# Altium PCB MDBT42Q - Copy (3) - Copy.PcbDoc
Units mil, origin at the board's own origin, x right, y up, seen from the top; angles counter-clockwise.
Board outline 996 x 1675 mil, 2 copper layers (Top Layer, Bottom Layer); 22 components, 17 nets, 121 pads, 0 vias.
Unrouted connection lines stored in the file: 1.
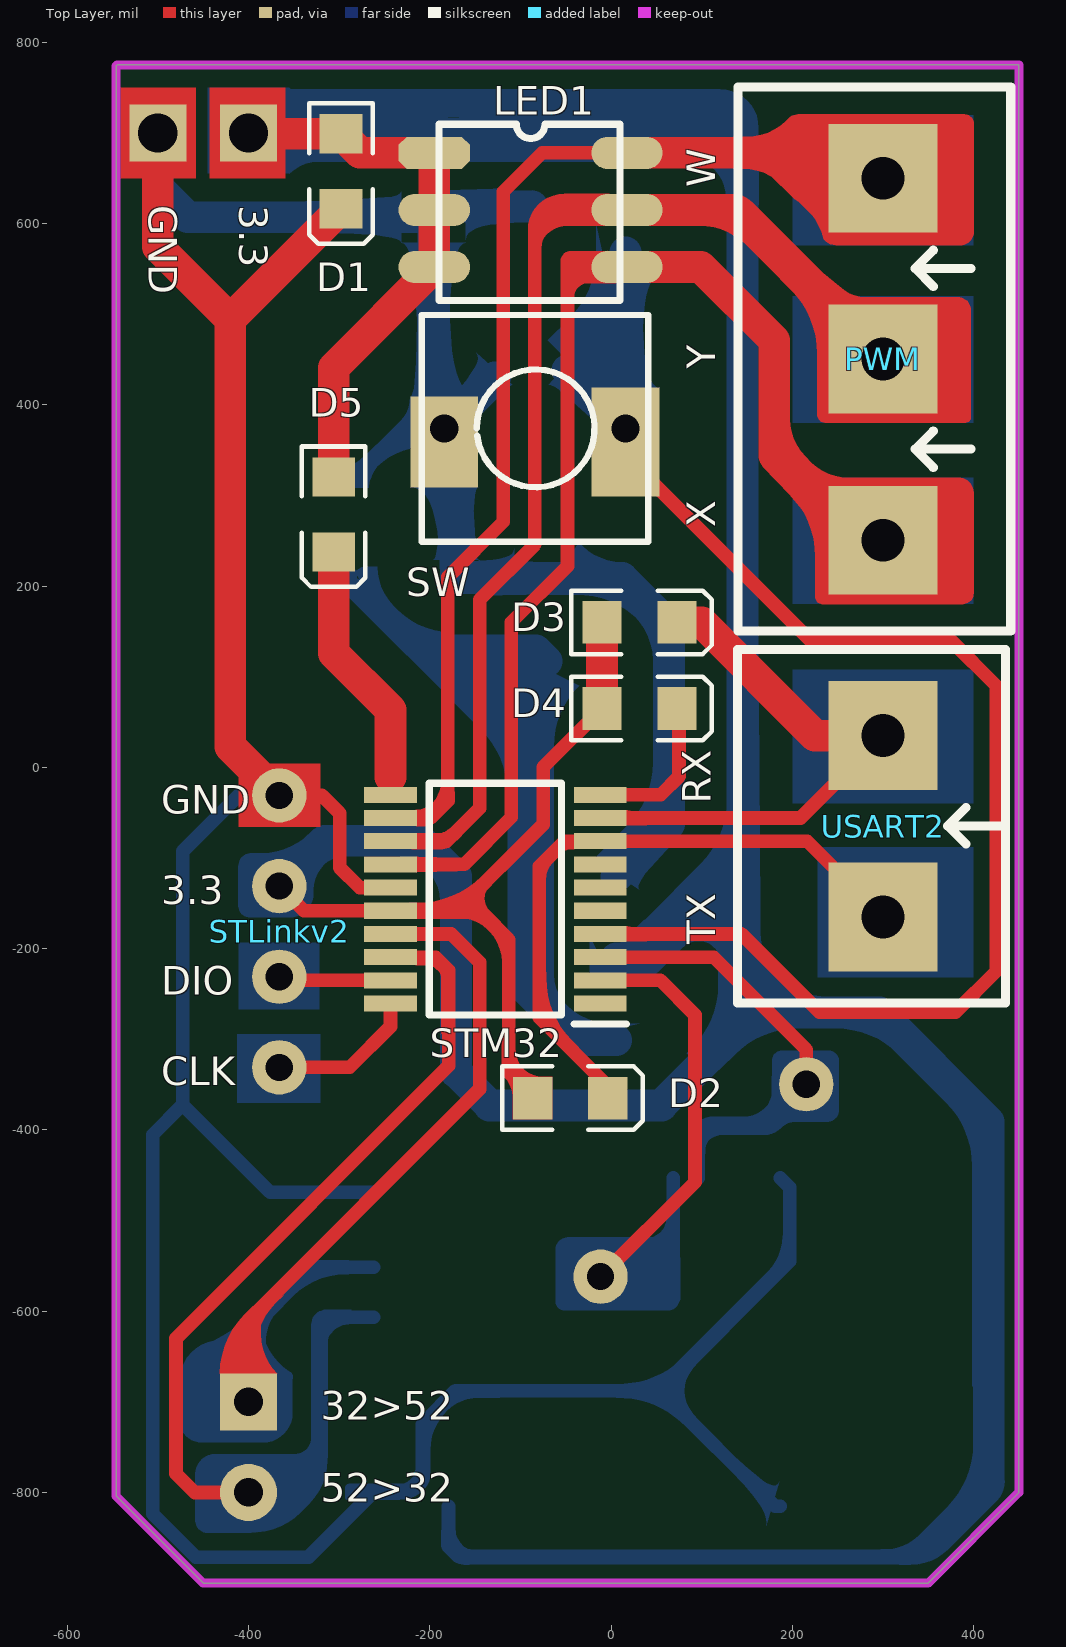
[diagram p0: Top Layer view]
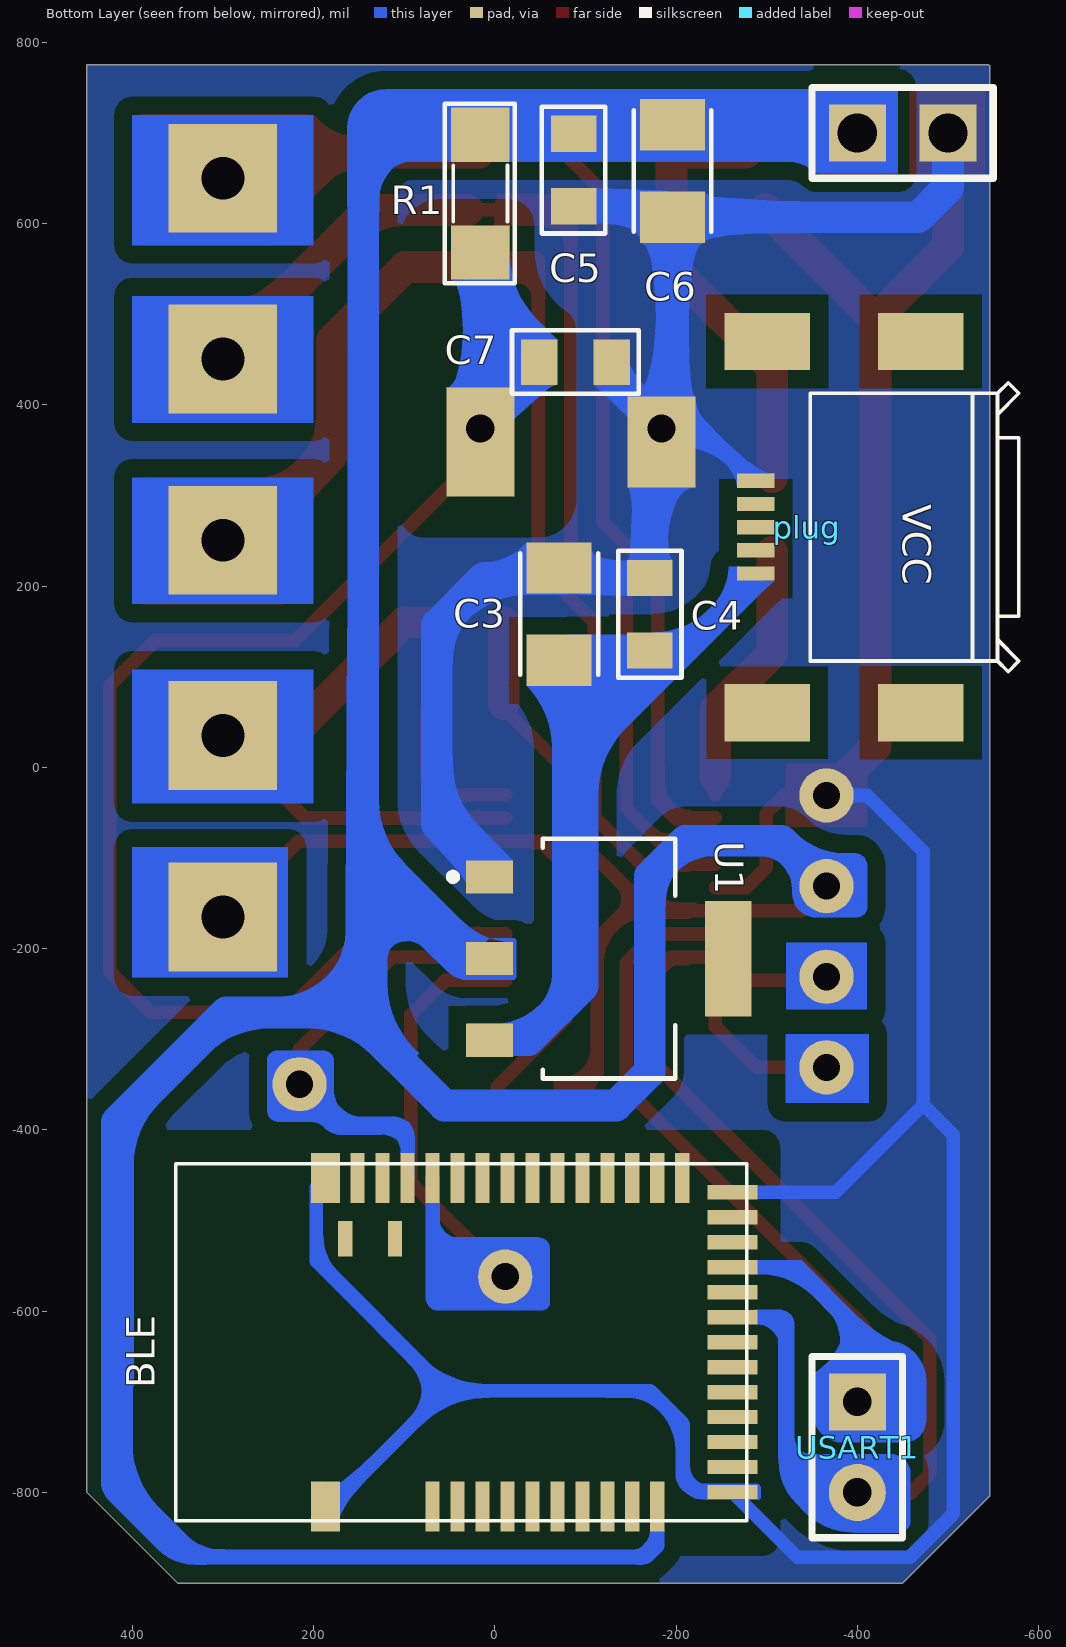
[diagram p1: Bottom Layer view, seen from below]
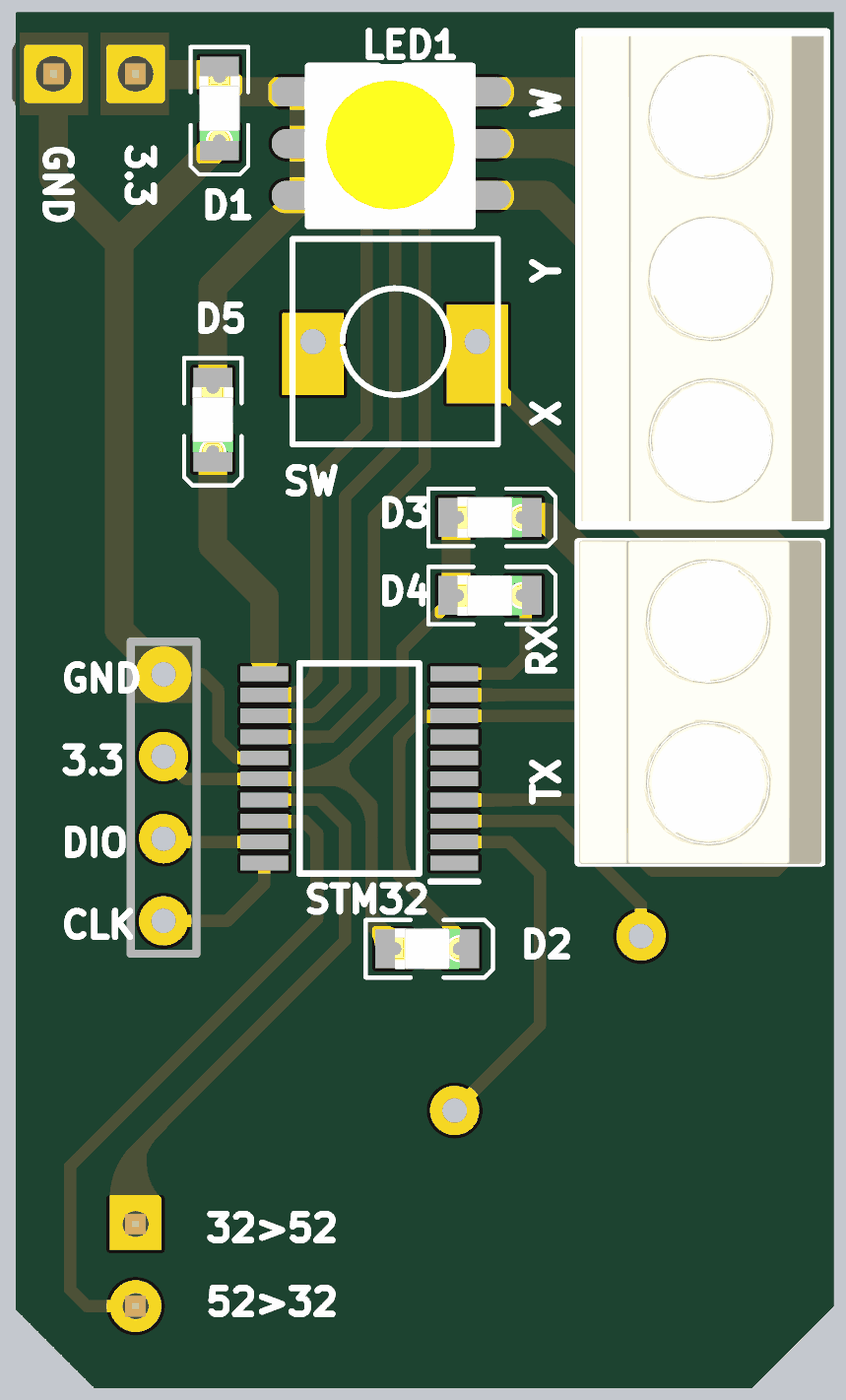
[diagram p2: 3D render of the assembled board from above, using the file's embedded part models]

## Layer stack, top to bottom
Top Solder: solder mask 0.4, Solder Resist, Dk 3.5
Top Layer: signal copper 1.4
Dielectric1: dielectric 12.6, FR-4, Dk 4.8
Bottom Layer: signal copper 1.4
Bottom Solder: solder mask 0.4, Solder Resist, Dk 3.5

## Board outline
-450,-900 -546,-804 -546,774 -545,775 450,775 450,-800 350,-900

## Design rules (kind name [scope] priority, off if disabled: settings)
Clearance [All] p1: gap=20
PlaneClearance [All] p1: clearance=39.37
PlaneConnect [All] p1: planeconnectstyle=Direct reliefexpansion=20 reliefentries=4 reliefconductorwidth=10 reliefairgap=10
PolygonConnect [All] p1: connectstyle=Direct reliefconductorwidth=10 reliefentries=4 polygonreliefangle="90 Angle" airgapwidth=10
RoutingVias [All] p1: holewidth=28 width=50 viastyle="Through Hole" minholewidth=28 minwidth=50 maxholewidth=28 maxwidth=50
SolderMaskExpansion [All] p1: expansion=4
Width [All] p1: maxlimit=35 minlimit=15 preferedwidth=20 minimp=50.000000 maximp=50.000000 favimp=50.000000
28 further rules are at their usual default settings.

## Components (designator, comment, footprint, x,y, rotation, side; value= is the part's Value field where it differs from the comment)
BLE "MODULE_MDBT42Q" PCB_MDBT42Q_10X16 352.12,-634.17 r90 bottom
C3 "C3216X5R1A106K160AB" CAPC3216X180 -71,169 r90 bottom
C4 "2u2" 0805C-GENERIC -171,139 r90 bottom
C5 "2u2" 0805C-GENERIC -87,689 r270 bottom
C6 "C3216X5R1A106K160AB" CAPC3216X180 -196,658.02 r270 bottom
C7 "10u" 0805C-GENERIC -59,447 r180 bottom
D1 "LED SMD" LED_0805_Blue -298,657.66 r270 top
D2 "LED SMD" LED_0805_Blue -45,-365 r0 top
D3 "LED SMD" LED_0805_Blue 31.34,160 r0 top
D4 "LED SMD" LED_0805_Blue 31.34,65 r0 top
D5 "LED SMD" LED_0805_Blue -306,279 r270 top
LED1 "150141M173100" "LED RGB 5050" -85,615 r0 top
plug "ZX62M-B-5P(01)" HRS_ZX62M-B-5P(01) -420,265 r90 bottom
PWM "Header 3 - M" "Medium - Header 3" 300,250.5 r90 top
R1 "RESISTOR SMD" RES-SM-1206 16,568 r90 bottom
STLinkv2 "JP" "Jumper 4x1" -306,-291 r0 top
STM32 "STM32F070F6P6" SOP65P640X120-20N -127.67,-145.43 r180 top
SW "SW" SW2 16,374 r180 top
U1 "AMS1117-3.3" SOT229P700X180-4N -126,-211 r270 bottom
USART1 "" JP2-D1T#1 -400,-700 r270 bottom
USART2 "Header 2 - M" "Medium - Header 2" 300,-65 r270 top
VCC "JP2" JP2-D1T#2 -400,700 r180 bottom

## Footprints (in the part's own frame and the unit in brackets; to place one, negate y for a bottom-side part, rotate by r counter-clockwise, add the part's x,y. Pads: shape width x height; smd on the part's side, far side on the other; paste and mask are expansions set on the pad)
0805C-GENERIC [mil] "CAPACITOR 0805"
  rect 40x50 smd: 1(-10,0) 2(70,0)
  silkscreen extent -40,-35 100,35, body extent -11,-25 70,25, height 26
CAPC3216X180 [mm]
  rect 1.44x1.82 smd: 1(-1.295,0) 2(1.295,0)
  silkscreen extent -1.7,-1.09 1.7,1.09
HRS_ZX62M-B-5P(01) [mm]
  rect 0.4x1.05 smd: 1(-1.3,3.355) 2(-0.65,3.355) 3(0,3.355) 4(0.65,3.355) 5(1.3,3.355)
  rect 1.6x2.4 smd: S1(5.2,-1.27) S2(-5.2,-1.27) S3(-5.2,3.03) S6(5.2,3.03)
  rect 0x0 smd: S4(-2.35,5.13) S5(2.35,5.13)
  silkscreen extent -4.05,-4.02 4.05,1.83
JP2-D1T#1 [mm] "2 pins, 1 row, straight, gold plating"
  rect 1.6x1.6 hole 0.8: 1(0,0)
  round 1.6 hole 0.8: 2(2.54,0)
  silkscreen extent -1.27,-1.27 3.81,1.27, body extent -1.27,-1.27 3.81,1.27, height 8.54
JP2-D1T#2 [mm] "2 pins, 1 row, straight, gold plating"
  rect 1.6x1.6 hole 1.1: 1(0,0) 2(2.54,0)
  silkscreen extent -1.27,-1.27 3.81,1.27, body extent -1.27,-1.27 3.81,1.27, height 8.54
"Jumper 4x1" [mil]
  round 60 hole 30: 1(-60,260) 2(-60,160) 3(-60,60) 4(-60,-40)
"LED RGB 5050" [mm]
  oct 2x0.9 smd: 1(-2.794,1.6)
  oval 2x0.9 smd: 2(-2.794,0) 3(-2.794,-1.6) 4(2.606,-1.6) 5(2.606,0) 6(2.606,1.6)
  silkscreen extent -2.67,-2.54 2.41,2.4, body extent -2.78,-2.54 2.52,2.46, height 1.6
LED_0805_Blue [mm] "Chip LED, 2-Leads, Body 2.0x1.3mm, IPC Medium Density"
  rect 1.1x1.2 smd: 1(-1.05,0) 2(1.05,0)
  silkscreen extent -1.91,-0.89 2.03,0.89, body extent -1,-0.63 1,0.62, height 0.68
"Medium - Header 2" [mil]
  rect 120x120 hole 47.24: 1(-100,0) 2(100,0)
  silkscreen extent -195,-161 195,135, body extent -197,-160 197,135, height 394
"Medium - Header 3" [mil]
  rect 120x120 hole 47.24: 1(0,0) 2(200,0) 3(399.5,0)
  silkscreen extent -100,-141 500,160, body extent -95,-138 495,157, height 394
PCB_MDBT42Q_10X16 [mm]
  rect 1.4x0.8 smd: 1(-4.6,-4.2) 39(4.6,-4.2)
  rect 1.4x0.4 smd: 2(-4.6,-7.2) 3(-4.6,-7.9) 4(-4.6,-8.6) 5(-4.6,-9.3) 6(-4.6,-10) 7(-4.6,-10.7) 8(-4.6,-11.4) 9(-4.6,-12.1) 10(-4.6,-12.8) 11(-4.6,-13.5) 25(4.6,-14.2) 26(4.6,-13.5) 27(4.6,-12.8) 28(4.6,-12.1) 29(4.6,-11.4) 30(4.6,-10.7) 31(4.6,-10) 32(4.6,-9.3) 33(4.6,-8.6) 34(4.6,-7.9) 35(4.6,-7.2) 36(4.6,-6.5) 37(4.6,-5.8) 38(4.6,-5.1)
  rect 0.4x1.4 smd: 12(-4.2,-15.6) 13(-3.5,-15.6) 14(-2.8,-15.6) 15(-2.1,-15.6) 16(-1.4,-15.6) 17(-0.7,-15.6) 18(0,-15.6) 19(0.7,-15.6) 20(1.4,-15.6) 21(2.1,-15.6) 22(2.8,-15.6) 23(3.5,-15.6) 24(4.2,-15.6)
  rect 1x0.4 smd: 40(2.9,-4.75) 41(2.9,-6.15)
  silkscreen extent -5,-16 5,0
RES-SM-1206 [mil]
  rect 60x65 smd: 1(0,0) 2(130,0)
  silkscreen extent -34,-38 164,39, body extent 2,-31 128,31, height 40
SOP65P640X120-20N [mm]
  rect 1.475x0.45 smd: 1(-2.938,2.925) 2(-2.938,2.275) 3(-2.938,1.625) 4(-2.938,0.975) 5(-2.938,0.325) 6(-2.938,-0.325) 7(-2.938,-0.975) 8(-2.938,-1.625) 9(-2.938,-2.275) 10(-2.938,-2.925) 11(2.938,-2.925) 12(2.938,-2.275) 13(2.938,-1.625) 14(2.938,-0.975) 15(2.938,-0.325) 16(2.938,0.325) 17(2.938,0.975) 18(2.938,1.625) 19(2.938,2.275) 20(2.938,2.925)
  silkscreen extent -3.68,-3.25 1.85,3.5, body extent -2.25,-3.3 2.25,3.3
SOT229P700X180-4N [mm]
  rect 0.93x1.31 smd: 1(-2.29,-3.345) 2(0,-3.345) 3(2.29,-3.345)
  rect 3.24x1.31 smd: 4(0,3.345)
  silkscreen extent -3.36,-4.47 3.36,1.86
SW2 [mil] "SW button 2pin, 250x 250 mil"
  rect 75x120 hole 31 copper offset 0,15: 1(0,0)
  rect 75x100 hole 31 copper offset 0,15: 2(200,0)
  silkscreen extent -25,-125 225,125

## Part data
BLE: "MDBT42Q"
C3 C6: "C Series 1206 10 uF 10 V ±10 % Tolerance X5R SMT Multilayer Ceramic Capacitor"
C4 C5 C7: library part 0805C-2U2-6V3-X5R-PAN, "CAPACITOR 0805 CERAMIC"
D1 D2 D3 D4 D5: "LED"
LED1: library part "LED RGB 5050"
plug: "Conn Rcpt Micro Usb b Mid Mnt"
PWM: "Header, 3-Pin, Medium"
R1: "Resistor"
STLinkv2: library part "Jumper 4x1"
STM32: "STMICROELECTRONICS - STM32F070F6P6 - MCU, 32BIT, CORTEX-M0, 48MHZ, TSSOP-20"
SW: library part "Tact SW - 2Pin", "Switch button 2 pin"
U1: "Sot223/Pkg 1-Amp 3.3-Volt Low Drop Out Voltage Regulatator"
USART1: library part JP2, "WR-PHD 2.54 mm Angled Socket Header"
USART2: "Header, 2-Pin, Medium"
VCC: "WR-PHD 2.54 mm Angled Socket Header"

## Free pads (board coordinates)
  round 60 hole 30: 3(215.41,-349.6) MD(-11.56,-561.87)

## Nets (pads, with @x,y where several pads share a name; then routed paths per layer and width w, separated by ;. In a path a pad name is that pad's centre, name@x,y a point inside that pad or via, vN(x,y) a via of type N, cw(c..) or ccw(c..) an arc to the next point about the centre after c; other vN are vias at no path point)
5.0V: C3.1 C4.1 plug.1 U1.3 | length 795.3
  Bottom Layer w15: plug.1 -287.91,196.91 -220,129 C4.1
  Bottom Layer w35: C3.1@-71,117.03 -82.97,129 C4.1 -97,55 -97,-241.19 -37.03,-301.16 U1.3
32>52: BLE.21 STM32.17 USART1.1 | length 948.2
  Top Layer w15: USART1.1 -400,-610 -145,-355 -145,-215 -176.18,-183.82 STM32.17
  Bottom Layer w15: USART1.1 -400,-620 -331.5,-551.5 BLE.21
52>32: BLE.19 STM32.18 USART1.2 | length 1137.3
  Top Layer w15: USART1.2 -459.38,-800 -480,-779.38 -480,-630 -179,-329 -179,-224 -193.59,-209.41 STM32.18
  Bottom Layer w15: USART1.2 -391,-791 -351,-791 -322,-762 -322,-625 -303.61,-606.61 BLE.19
+3.3V: BLE.11 C5.1 C6.1 D1.1 D2.1 D3.1 D4.1 D5.1 LED1.1 LED1.2 LED1.3 R1.2 STLinkv2.2 STM32.16 U1.2 VCC.1 | length 5370.3
  Top Layer w15: STLinkv2.2 -338.77,-158.23 STM32.16 -144.77,-158.23 -113,-190 -113,-336.34 -85.34,-364 D2.1 ; -170.12,-158.11 -75,-63 -75,0 D4.1
  Top Layer w35: VCC.1 -399,699 D1.1 -276.99,677.99 LED1.1 LED1.2 LED1.3 -306,441.01 D5.1 ; D4.1@-10,70 D3.1
  Bottom Layer w15: BLE.11 -179.37,-853.28 -160.46,-872.19 331.81,-872.19 416.87,-787.13
  Bottom Layer w35: VCC.1@-396,709 C6.1 -186,699 C5.1 -86,698 R1.2 107.12,698.02 145,660.14 145,-85 ; STLinkv2.2 -315.86,-80.86 -210.14,-80.86 -171,-120 -171,-336 -134,-373 55.61,-373 158.18,-270.43 ; U1.2 19,-211 145,-85 ; 145,-279.85 145,-85 ; 159.1,-270.43 296.17,-270.43 416.87,-391.13 416.87,-787.13
CLK: STLinkv2.4 STM32.20 | length 156
  Top Layer w15: STLinkv2.4 -288.3,-331 -243.34,-286.04 -243.34,-271.36
DIO: STLinkv2.3 STM32.19 | length 124.3
  Top Layer w15: STLinkv2.3 -362,-235 STM32.19
GND: BLE.1 BLE.12 BLE.24 BLE.39 C3.2 C4.2 C5.2 C6.2 C7.2 D1.2 plug.5 STLinkv2.1 STM32.15 SW.2 U1.1 VCC.2 | length 5124.7
  Top Layer w15: STLinkv2.1 -319,-31 -299.52,-50.48 -299.52,-110.48 -277.36,-132.64 STM32.15
  Top Layer w35: VCC.2 -500,574.32 -420,494.32 ; STLinkv2.1 -420,23 -420,494.32 ; D1.2 -420,494.32
  Bottom Layer w15: STLinkv2.1 -411,-31 -472.7,-92.7 -472.7,-372.3 ; plug.5 -230.09,374 -194,374 SW.2 ; BLE.24 -376.18,-468.82 -472.7,-372.3 ; BLE.1 181.27,-815.27 54,-688 ; BLE.39 197,-463.3 197,-545 54,-688 ; -472.7,-372.3 -505.69,-405.29 -505.69,-823.65 -458.08,-871.26 -333.78,-871.26 BLE.12 -223.53,-799.53 -208,-784 -208,-725 -171,-688 54,-688
  Bottom Layer w35: VCC.2 -500,640 -467.03,607.03 C6.2 ; SW.2@-194,371 -194,374 -196,376 C6.2 ; C7.2@-128,430 SW.2 -171,361 C4.2 12,209 64,157 64,-62.54 U1.1 ; C5.2 -184.03,619 C6.2
MD_RESET: BLE.35 pad.MD STM32.2 | length 635.5
  Top Layer w15: STM32.2 54.5,-235 92.59,-273.09 92.59,-457.72 pad.MD
  Bottom Layer w15: pad.MD -7.13,-566.3 48.13,-566.3 68.66,-545.78 BLE.35
NetC7_1: C7.1 R1.1 STM32.4 SW.1 | length 1635.1
  Top Layer w15: STM32.4 143.82,-183.82 230,-270 380,-270 425,-225 425,90 375,140 220,140 16,344 SW.1
  Bottom Layer w35: C7.1@-48,438 SW.1 R1.1
PA2: D2.2 STM32.8 USART2.2 | length 713
  Top Layer w15: D2.2 -2.66,-364 -2.66,-352.34 -79,-276 -79,-109 -51.46,-81.46 STM32.8 216.46,-81.46 USART2.2
PA3: D3.2 STM32.9 USART2.1 | length 628.7
  Top Layer w15: STM32.9 209.13,-55.87 USART2.1
  Top Layer w35: D3.2 100,160 225,35 USART2.1
PA4: D4.2 STM32.10 | length 170.4
  Top Layer w15: STM32.10 54.72,-30.28 75,-10 D4.2@75,65
PA5: D5.2 STM32.11 | length 293.9
  Top Layer w15: STM32.11 -243.34,-10.66
  Top Layer w35: D5.2 -306,126 -243.34,63.34 -243.34,-10.66
PWM_WHITE: LED1.6 PWM.3 STM32.12 | length 1215.7
  Top Layer w15: STM32.12 -200.87,-55.87 -180,-35 -180,210 -119,271 -119,635 -76.01,677.99 LED1.6
  Top Layer w35: LED1.6 272.01,677.99 PWM.3
PWM_X: LED1.4 PWM.1 STM32.14 | length 1326.1
  Top Layer w15: STM32.14 -162.05,-107.05 -110,-55 -110,160 -48,222 -48,537 -32.99,552.01 LED1.4
  Top Layer w35: LED1.4 98.99,552.01 180,471 180,344 273.5,250.5 PWM.1
PWM_YELLOW: LED1.5 PWM.2 STM32.13 | length 1237.4
  Top Layer w15: STM32.13 -181.46,-81.46 -145,-45 -145,185 -84,246 -84,592 -61,615 LED1.5 LED1.5@30,615
  Top Layer w35: LED1.5@30,615 135.5,615 PWM.2
SWDCLK: BLE.36 pad.3 STM32.3 | length 497.9
  Top Layer w15: STM32.3 113.41,-209.41 215.41,-311.41 pad.3
  Bottom Layer w15: BLE.36 96.22,-405.31 104.69,-396.84 168.17,-396.84 pad.3
pads on no net: BLE.2 BLE.3 BLE.4 BLE.5 BLE.6 BLE.7 BLE.8 BLE.9 BLE.10 BLE.13 BLE.14 BLE.15 BLE.16 BLE.17 BLE.18 BLE.20 BLE.22 BLE.23 BLE.25 BLE.26 BLE.27 BLE.28 BLE.29 BLE.30 BLE.31 BLE.32 BLE.33 BLE.34 BLE.37 BLE.38 BLE.40 BLE.41 plug.2 plug.3 plug.4 plug.S1 plug.S2 plug.S3 plug.S4 plug.S5 plug.S6 STM32.1 STM32.5 STM32.6 STM32.7 U1.4

## Polygon pours and split planes (outlines as drawn)
no net on Top Layer "NONET_L01_P011" (solid, pour order 11): 240.32,727.54
GND on Top Layer "GND_L01_P001" (solid, pour order 1): -276.99,660.49
GND on Bottom Layer "GND_L02_P015" (solid, pour order 15): -545,775 450,775 450,-800 360,-890 350,-900 -435,-900 -450,-900 -530,-820 -546,-804 -546,774

## Keep-outs
Top Layer:
  the board outline again, w10

## Other copper
Top Layer:
  rectangle net GND: -411.01,-66.03 -320.75,4.05
  rectangle net GND: -541.34,649.61 -457.68,750
  rectangle net +3.3V: -442.91,649.61 -359.25,750
  region: -21.38,418.88
  region net PWM_WHITE: 17.85,673.94
  region net PWM_X: -3.4,569.73 -45.08,569.5 -42.34,567.46 -4.09,568.41
  region: -44.5,-8.5
  region: 11.3,41.4
  region: -272.28,-149.53
  region net PWM_YELLOW: -215.38,-72.64 -190.04,-72.64 ccw(c-190.04,-56.37) -178.54,-67.88 -175.75,-70.67 ccw(c-164.71,-59.63) -164.71,-75.24 -175.56,-86.09 cw(c-185.44,-76.2) -185.44,-90.19 -218.43,-90.19 cw(c-218.43,-82.62) -223.78,-87.97
  region net PWM_WHITE: -214.69,-64.73 -202.43,-64.73 ccw(c-202.43,-53.01) -194.14,-61.3 -174.06,-41.22 ccw(c-177.7,-37.57) -172.55,-37.57 -172.55,-27.85 ccw(c-175.42,-27.85) -173.39,-25.82 -198.73,-51.16 cw(c-218.2,-31.7) -218.2,-59.23
  region net PWM_WHITE: -215.38,-46.92 ccw(c-215.38,-21.8) -197.61,-39.56 -196.87,-38.83 ccw(c-219.5,-16.2) -187.5,-16.2 -187.5,5.26 -187.1,5.26 cw(c-185.32,0.55) -183.25,0.55 -183.25,-39.14 -188.1,-43.99 cw(c-214.83,-17.27) -214.83,-55.06
  region net +3.3V: -215.42,-166.95 -153.64,-166.95 ccw(c-153.64,-164.4) -151.83,-166.2 cw(c-149.58,-163.94) -152.77,-163.94 -152.77,-161.71 -217.76,-161.71
  region net 52>32: -215.55,-218.37 -202.66,-218.37 cw(c-202.66,-232.63) -192.57,-222.55 -190.27,-224.85 cw(c-197.55,-232.14) -187.25,-232.14 -187.25,-293.05 cw(c-188.87,-293.05) -187.73,-294.2 cw(c-182.58,-299.34) -182.59,-292.07 -182.59,-229.41 ccw(c-200.8,-229.41) -187.92,-216.53 ccw(c-193.3,-221.92) -193.3,-214.3 -215.55,-214.3
  region net PWM_YELLOW: -35.9,632.73 -51.6,632.73 ccw(c-51.6,592.78) -91.56,592.78 ccw(c-90.78,592.78) -90.78,592 -84,592 -37.01,612.89 -10.75,622.27
  region net PA2: -40.68,-90.36 -45.6,-90.36 ccw(c-45.6,-99.29) -51.91,-92.97 -65.29,-106.35 ccw(c-50.27,-121.38) -71.52,-121.38 -81.42,-121.38 cw(c-81.42,-114.3) -86.42,-119.3 -58.43,-91.32 cw(c-39.36,-110.39) -39.36,-83.42
  region net PWM_WHITE: 149.54,695.63 ccw(c149.54,758.05) 193.67,713.91 196.03,716.28 cw(c205.93,706.38) 205.93,720.38 389.99,720.38 cw(c390,710.13) 400.24,710.13 400.24,591.28 cw(c385,591.28) 385,576.04 251.04,576.04 cw(c248.81,593.59) 234.77,582.83 ccw(c165.75,565.82) 202.51,626.66 172.89,656.28 ccw(c160.51,643.91) 160.51,661.41
  region net PWM_X: 167.63,331.63 196.01,303.24 cw(c125.3,232.53) 225.3,232.53 225.3,188.36 ccw(c233.79,188.36) 233.79,179.86 388.37,179.86 ccw(c388.37,192) 400.01,192 400.01,303.15 ccw(c383.52,303.15) 383.52,319.64 261.32,319.64 cw(c261.32,376.61) 221.03,336.33 214.62,342.73 cw(c256.42,384.53) 197.31,384.53 189.73,384.53 cw(c189.73,393.32) 183.51,387.11 179.32,382.91 ccw(c209.15,353.08) 166.96,353.08
  region net PWM_YELLOW: 233.83,545.62 156.26,623.19 ccw(c133.77,600.7) 133.77,632.5 128.54,632.5 ccw(c128.54,607.1) 110.58,625.06 107.21,621.69 ccw(c131.3,597.6) 97.23,597.6 cw(c97.23,523.32) 149.75,575.84 198.35,527.24 cw(c127.64,456.52) 227.64,456.52 227.64,388.69 ccw(c235.9,388.69) 235.9,380.43 391.47,380.43 ccw(c391.47,385.85) 396.89,385.85 396.89,504.55 ccw(c382.71,504.55) 382.71,518.73 281.15,518.73 cw(c281.15,560.49) 251.62,530.96
  region net PWM_YELLOW: -1.94,632.73 -35.9,632.73 ccw(c-35.9,589.32) -66.6,620.02 ccw(c-42.51,595.93) -76.57,595.93 -76.57,575.22 cw(c-59.26,575.22) -71.5,587.46 cw(c-47.76,563.72) -47.76,597.29 0.32,597.29 0.32,620.54 ccw(c-8.52,620.54) -2.27,626.8
  region net PWM_X: 4.97,534.28 -25.22,534.28 ccw(c-25.22,518.98) -40.52,518.98 cw(c-44.13,518.98) -44.13,515.36 -52.6,515.36 cw(c-52.6,518.23) -55.47,518.23 -55.47,558.8 cw(c-44.77,558.8) -44.77,569.5 -5,569.5
  region net PA2: -43.11,-301.33 cw(c25.79,-232.44) -71.64,-232.44 -71.64,-225.93 ccw(c-65.47,-232.11) -74.2,-232.11 -74.2,-272.35 ccw(c-66.81,-272.35) -72.04,-277.57 -46.93,-302.68
  region net +3.3V: -64.88,-341.32 -76.19,-341.32 cw(c-76.19,-313.15) -96.11,-333.07 cw(c-72.94,-309.9) -105.71,-309.9 -105.71,-282.66 -108.27,-282.66 ccw(c-108.27,-292.1) -114.94,-285.43 ccw(c-101.64,-298.73) -120.45,-298.73 -120.45,-337.27 -120.31,-337.4 cw(c-150.56,-367.13) -108.22,-369.5 -108.22,-388.33 -66.01,-388.33 ccw(c-66.01,-386.99) -65.06,-387.94
  region net +3.3V: -168.54,-165.69 cw(c-168.54,-211.63) -136.06,-179.15 -134.35,-180.86 cw(c-168.46,-214.97) -120.22,-214.97 -120.22,-249.7 ccw(c-122.75,-247.17) -119.18,-247.17 -119.18,-192.49 -146.74,-164.93 ccw(c-151.06,-169.26) -151.06,-163.14 -165.7,-163.14 ccw(c-165.7,-165.89) -167.64,-163.95
  region net +3.3V: -222.25,-149.41 -213.5,-149.41 ccw(c-213.5,-49.41) -142.79,-120.12 -125.21,-102.54 -124.9,-102.86 ccw(c-124.9,-112.56) -126.46,-111 -167.96,-152.49 cw(c-170.92,-149.53) -170.92,-153.72 -221.58,-153.72
  region net +3.3V: -131.42,-130 -135.45,-134.03 ccw(c-124.98,-144.49) -139.78,-144.49 ccw(c-120.09,-144.49) -134.02,-158.42 -109.27,-183.16 cw(c-114.83,-177.6) -114.83,-185.46 -120.44,-185.46 ccw(c-127.44,-185.46) -122.49,-180.51 -144.77,-158.23 ccw(c-153.5,-166.96) -153.5,-154.61 -157.73,-154.61
  region net 32>52: -395.03,-594.37 -404.66,-604.01 ccw(c-339.89,-668.78) -431.5,-668.78 ccw(c-418.96,-656.24) -418.96,-673.97 -376.8,-673.97 ccw(c-376.8,-665.9) -371.09,-671.61 -368.44,-668.96 cw(c-325.05,-625.57) -386.41,-625.57 -386.41,-615.78 cw(c-365.59,-615.78) -380.31,-601.06 -364.09,-584.84
  region net PWM_X: 359.9,310.8 284.12,310.8 cw(c284.12,410.8) 213.41,340.09 212.1,341.4 cw(c249.76,379.06) 196.5,379.06 196.5,399.4 165.9,368.8 cw(c161.73,364.63) 167.63,364.63 167.63,331.63 210.81,288.44 cw(c140.1,217.73) 240.1,217.73 240.1,192.1 ccw(c240.1,272.01) 296.61,215.51 311.2,230.1
  region net PWM_YELLOW: 359.5,510.4 310.47,510.4 cw(c310.47,610.4) 239.76,539.69 233.83,545.62 cw(c216.41,563.04) 216.41,538.4 186.8,538.4 210.81,514.39 cw(c140.1,443.68) 240.1,443.68 240.1,391
  region net PWM_WHITE: 240.4,590.8 188.34,642.86 ccw(c146,600.53) 146,660.4 ccw(c146,665.47) 149.58,661.88 182.4,694.7 ccw(c222.74,735.04) 222.74,677.99 272.01,677.99
  region net 32>52: -361.3,-582.2 -370.62,-591.52 ccw(c-318.04,-644.1) -392.4,-644.1 ccw(c-407.37,-644.1) -396.78,-633.52 -398.4,-631.9 cw(c-394.54,-628.04) -400,-628.04 -400,-610
Bottom Layer:
  rectangle net PA2: 228,-232 400,-88
  rectangle net PA3: 200,-40 400,108
  rectangle net PWM_X: 200,180 400,320
  rectangle net PWM_YELLOW: 200,380 400,520
  rectangle net PWM_WHITE: 200,576 400,720
  rectangle net +3.3V: -445,655 -355,750
  rectangle net DIO: -410.86,-267.39 -321.42,-193.2
  rectangle net CLK: -412.68,-370.47 -320.74,-294.01
  region net 5.0V: -308.53,206.05 -291.19,206.05 -291.19,189.62
  region net +3.3V: 196.57,-279
  region: -115.67,-861.66
  region net MD_RESET: 76.15,-541.05 76.15,-587.56 cw(c61.47,-583.7) 57.61,-598.38
  region net MD_RESET: 60.94,-479.48 60.94,-498.56 cw(c40.82,-498.56) 40.82,-518.68 -48.41,-518.68 ccw(c-48.41,-531.16) -60.89,-531.16 -60.89,-590.13 ccw(c-52.14,-590.13) -52.14,-598.88 63.54,-598.88 ccw(c63.54,-587.38) 75.04,-587.38 75.04,-537.82 ccw(c70.33,-537.82) 70.33,-533.11
  region net +3.3V: 20.83,-234.49 29.65,-234.49 ccw(c29.65,-202) 52.62,-224.97 78.11,-199.49 cw(c96.87,-218.25) 96.87,-191.72 97.74,-191.72 cw(c97.74,-214) 113.5,-198.24 cw(c101.28,-210.46) 118.56,-210.46 118.56,-239.11 cw(c18.56,-239.11) 89.27,-309.82 83.51,-315.58 86.98,-319.05 ccw(c90.05,-315.98) 90.05,-320.32 ccw(c90.05,-300.25) 104.25,-314.44 154.2,-264.49 154.2,-188.99 ccw(c81.18,-188.99) 132.82,-137.36 ccw(c132.82,-232.02) 65.88,-165.08 16.83,-214.13 ccw(c19.37,-216.67) 15.78,-216.67
  region net +3.3V: -357.31,748.06 120.29,748.06 cw(c120.29,705.78) 162.57,705.78 162.57,621.43 cw(c149.6,621.43) 149.6,608.46 cw(c149.6,620.62) 137.43,620.62 137.43,677.39 ccw(c96.88,677.39) 96.88,717.94 -363.78,717.94
  region net +3.3V: 241.69,-253.15 240.4,-253.15 cw(c240.4,-174.52) 184.8,-230.12 cw(c233.58,-181.34) 164.6,-181.34 164.6,-154.24 cw(c155.52,-154.24) 161.94,-160.65 151.21,-171.39 cw(c147.83,-174.77) 152.61,-174.77 152.61,-226.6 cw(c152.61,-240.83) 162.66,-230.77 192.32,-260.42 ccw(c216.12,-236.62) 216.12,-270.28 250.57,-270.28
  region net +3.3V: -16.38,668.12 -323.33,668.12 ccw(c-323.33,623.33) -355,655 -371.06,671.06 cw(c-367.62,674.51) -372.49,674.51 ccw(c-372.49,715.29) -343.65,686.45 -326.21,703.89 ccw(c-308.36,721.75) -308.36,696.49 -6.83,696.49
  region net +3.3V: 48.29,668 93.44,668 cw(c93.44,638.71) 114.15,659.42 cw(c82.25,627.52) 127.37,627.52 127.37,613.81 127.77,613.81 ccw(c127.77,620.24) 132.32,615.69 ccw(c120.34,627.67) 137.28,627.67 137.28,655.48 ccw(c125.19,655.48) 133.74,664.03 113.61,684.15 ccw(c106.71,677.25) 106.71,687.01 42.74,687.01
  region net +3.3V: -162.62,737.29 102.27,737.29 cw(c102.27,676.72) 162.84,676.72 162.84,621.26 cw(c149.38,621.26) 149.38,607.81 142.16,607.81 cw(c142.16,617.65) 132.32,617.65 132.32,672.82 ccw(c107.12,672.82) 107.12,698.02 -160.38,698.02 cw(c-160.38,705.93) -168.29,705.93
  region net +3.3V: -231.71,737.23 -327.23,737.23 cw(c-327.23,772.84) -352.42,747.66 -360.49,739.59 cw(c-365.91,745.01) -365.91,737.34 cw(c-365.91,699.23) -338.97,726.18 -338.48,725.69 ccw(c-316,748.18) -316,716.38 -221.78,716.38
  region net +3.3V: -231.71,680.77 -292.78,680.77 ccw(c-292.78,592.78) -355,655 -356.92,656.92 ccw(c-373.67,640.17) -373.67,663.86 -373.67,701.96 cw(c-311.21,701.96) -355.38,746.12 -355.38,703.73 ccw(c-345.44,703.73) -352.47,696.7 ccw(c-345.62,703.55) -345.62,693.87 -226.44,693.87
  region net +3.3V: -20,-192.76 ccw(c-20,-114.72) 35.18,-169.9 36.78,-168.3 49.99,-181.51 cw(c33.3,-198.2) 56.9,-198.2 39.09,-216.01 ccw(c51.77,-228.69) 33.84,-228.69 33.84,-229.51 cw(c28.78,-229.51) 28.78,-234.57 -19.35,-234.57 cw(c-19.35,-230.3) -23.61,-230.3 -23.61,-191 cw(c-21.34,-191) -21.34,-188.73 5.95,-188.73 6.16,-188.52 12.74,-195.1 ccw(c12.9,-220.66) -5.18,-202.59 -12,-209.41
  region net GND: -20.1,-102.54 17.26,-65.17 ccw(c-53.45,5.54) 46.55,5.54 46.55,12.03 ccw(c66.89,-8.31) 55.08,-8.31 55.08,-88.99 cw(c-1.76,-32.16) -1.76,-112.53 -12.12,-112.53
  region net +3.3V: 339.38,-847.65 cw(c302.5,-810.76) 302.5,-862.93 297.72,-862.93 297.72,-873 ccw(c299.17,-873) 298.14,-874.03 cw(c315.94,-891.83) 315.94,-866.66 331.44,-866.66
  region net +3.3V: 318.2,-879.57 330.92,-879.57 ccw(c330.92,-821.79) 371.78,-862.65 425.48,-808.94 ccw(c403.86,-787.32) 434.44,-787.32 ccw(c434.44,-852.01) 388.69,-806.27 352.13,-842.83
  region net +3.3V: -187.21,-841.87 -187.21,-857.59 ccw(c-175.94,-857.59) -183.91,-865.56 -174.95,-874.51 ccw(c-162.52,-862.08) -162.52,-879.66 -157.45,-879.66 ccw(c-157.45,-873.67) -153.21,-877.91 -175.91,-855.2 cw(c-162.26,-841.55) -181.57,-841.55
  region net MD_RESET: 44.3,-559 cw(c44.3,-516.75) 14.43,-546.63 4.4,-536.6 4.4,-587.2 cw(c37.27,-620.07) 37.27,-573.58 48.28,-573.58 cw(c48.28,-568.81) 44.9,-572.18 41.1,-568.39
  region net GND: 46.38,-2.57 46.38,-13.69 cw(c-50.52,-13.69) 18,-82.2 ccw(c26.06,-74.14) 26.06,-85.54 40.37,-85.54 cw(c78.65,-85.54) 51.58,-58.47 58.23,-51.82 cw(c73.54,-36.51) 51.88,-36.51 51.88,-6.41
  region net GND: 26.5,166.36 cw(c-21.48,118.38) 46.38,118.38 46.38,113.62 ccw(c46.38,123.69) 53.5,116.57 56.22,119.3 ccw(c54.23,121.29) 57.05,121.29 57.05,152.69 cw(c57.05,166.4) 47.36,156.71 29.85,174.22
  region net PWM_WHITE: -227.21,125.62 -143.51,41.92 cw(c-214.22,-28.79) -114.22,-28.79 -114.22,-74.47 ccw(c-114.22,-46.56) -94.48,-66.29 -92.79,-64.6 ccw(c-105.58,-51.81) -87.5,-51.81 -87.5,34.61 ccw(c-104.94,34.61) -92.61,46.94 -172.5,126.84
  region net 5.0V: -35.2,90.2 ccw(c32.4,22.6) -63.2,22.6 -63.2,-3.4 ccw(c-137.07,-3.4) -84.84,48.84 -150.4,114.4 -142.64,122.16 cw(c-118.4,97.92) -118.4,132.2
  region net GND: -262.8,351.38 -277.1,337.07 cw(c-308.62,368.59) -308.62,324.01 cw(c-308.62,322.01) -307.21,323.43 -292.87,309.09 ccw(c-291.05,310.92) -291.05,308.34 -267.33,308.34 cw(c-224.06,308.34) -254.66,338.94 -232.75,360.84
  region net 5.0V: -267.26,205.95 ccw(c-221.19,205.95) -253.76,173.38 -216.86,136.47 -217.21,136.12 cw(c-221.25,142.91) -226.04,138.11 -296.81,208.88 cw(c-294.34,211.35) -297.84,211.35
  region net +3.3V: -328.24,-68.49 -332.88,-73.13 cw(c-384.56,-21.46) -384.56,-94.54 -396.56,-94.54 ccw(c-396.56,-109.04) -411.06,-109.04 -411.06,-153.04 ccw(c-398.56,-153.04) -398.56,-165.54 -354.56,-165.54 ccw(c-354.56,-139.29) -328.31,-139.29 -328.31,-135.3 cw(c-289.04,-135.3) -316.81,-107.54 cw(c-294.48,-129.86) -294.48,-98.29 -239.38,-98.29 cw(c-239.38,-150.36) -202.56,-113.54 cw(c-236.36,-147.34) -188.56,-147.34 -188.56,-152.54 ccw(c-188.56,-125.38) -169.36,-144.59 -166.81,-142.04 cw(c-139.64,-114.87) -178.06,-114.87 -178.06,-112.79 cw(c-178.06,-97.09) -189.16,-108.19 -212.06,-85.29
  region net 5.0V: 31.11,-282.92 0.22,-282.92 cw(c0.22,-213.37) -48.95,-262.55 cw(c-14.56,-228.16) -63.2,-228.16 -63.2,9.6 ccw(c-112.97,9.6) -77.78,44.79 -85.88,52.89 ccw(c-68.23,35.24) -93.19,35.24 -93.19,-247.58 cw(c-93.19,-287.51) -64.95,-259.28 -28.3,-295.93
  region net 5.0V: -176.49,149.2 cw(c-176.49,232.1) -235.1,173.48 -240.07,178.45 cw(c-196.93,221.59) -257.94,221.59 -268.44,221.59 ccw(c-268.44,201.02) -282.98,215.56 cw(c-300.91,197.64) -275.56,197.64 -275.56,187.72 ccw(c-267.93,187.72) -273.32,182.32 -220,129 -171,129
  region net GND: -221.38,408.88 cw(c-259.69,408.88) -232.6,381.79 -241.64,372.75 ccw(c-201.35,332.46) -258.33,332.46 -258.33,331.53 cw(c-204.96,278.17) -204.96,353.64 -194.53,353.64 -194.53,383.1 ccw(c-196.87,383.1) -195.21,384.75
  region net NetC7_1: -16.54,598.15 -16.54,565.91 cw(c-116.54,565.91) -45.82,495.2 -69.63,471.4 -14.12,415.89 ccw(c-10.93,419.08) -10.93,414.57 14.13,414.57 cw(c14.13,399.24) 24.97,410.08
  region net +3.3V: 162.55,152.89 164.5,-159.34 ccw(c266.05,-175.28) 182.98,-235.82 ccw(c239.72,-158.8) 254.05,-253.38 161.56,-253.38
  region net +3.3V: 128.06,-9.65 128.06,-35.89 cw(c28.06,-35.89) 98.77,-106.6 124.92,-80.45 cw(c128.65,-84.18) 128.65,-78.91
  region net +3.3V: 56.9,-198.2 88.85,-166.25 cw(c111.91,-189.3) 111.91,-156.7 113.57,-156.7 cw(c113.57,-162.49) 117.67,-158.4 cw(c94.22,-181.85) 127.38,-181.85 127.38,-246.59 128.46,-246.59 ccw(c128.46,-236.98) 135.26,-243.78 cw(c136.61,-242.43) 134.7,-242.43 134.7,-121.67 cw(c134.7,-118.6) 132.53,-120.77 125.27,-113.52
  region net +3.3V: 198.15,-279.2 251.96,-279.2 cw(c251.96,-379.2) 322.68,-308.49 380.29,-366.1 cw(c382.98,-363.41) 379.17,-363.41 379.17,-351.62 cw(c379.17,-348.92) 377.26,-350.83 303.07,-276.64 ccw(c285.96,-293.75) 285.96,-269.55 204.63,-269.55
  region net +3.3V: 121.57,-331.67 136.25,-316.99 cw(c206.96,-387.7) 206.96,-287.7 220.6,-287.7 cw(c220.6,-229.61) 179.52,-270.68 cw(c157.38,-248.55) 157.38,-279.85 145,-279.85
  region net +3.3V: 241.87,-287.86 247.41,-287.86 cw(c247.41,-387.86) 318.12,-317.15 322.05,-321.08 ccw(c315.33,-314.36) 324.83,-314.36 324.83,-298.99 cw(c324.83,-253.56) 292.7,-285.69 287.68,-280.67
  region net +3.3V: 288.7,-288.67 369.27,-369.25 cw(c298.56,-439.96) 398.56,-439.96 398.56,-682.84 ccw(c398.56,-660.11) 414.63,-676.18 422.42,-668.39 cw(c431.53,-659.29) 418.65,-659.29 418.65,-404.79 ccw(c377.74,-404.79) 406.67,-375.86 371.57,-340.77
  region net +3.3V: 399.98,-709.14 399.98,-745.61 cw(c299.98,-745.61) 370.69,-816.32 327.32,-859.69 cw(c316.5,-870.52) 331.81,-870.52 331.81,-872.19 cw(c331.81,-874.95) 333.76,-873 340.09,-879.33 409.58,-809.84 cw(c426.58,-825.37) 425.54,-802.37 423.54,-777.86 cw(c436.94,-777.86) 427.47,-768.38
  region net +3.3V: -171.5,-842.19 ccw(c-151.57,-842.19) -165.66,-856.28 -162.79,-859.15 ccw(c-153.35,-849.72) -153.35,-863.06 -126.7,-863.06 -126.7,-866.66 cw(c-131.82,-866.66) -128.2,-870.28 cw(c-132.82,-865.66) -132.82,-872.19 -160.46,-872.19 cw(c-160.46,-867.55) -163.74,-870.83 -177.63,-856.94
  region net +3.3V: -126.7,-863.06 319.19,-863.06 ccw(c319.19,-851.56) 327.32,-859.69 328.8,-861.17 cw(c322.42,-867.55) 331.44,-867.55 329.75,-867.55 ccw(c329.75,-882.75) 319,-872 ccw(c310.84,-880.16) 310.84,-868.62 -127.09,-868.62
  region net GND: 189.35,-516.95 cw(c133.11,-516.95) 172.88,-556.72 69.46,-660.14 ccw(c69.46,-630.18) 90.64,-651.36 197,-545
  region net GND: -122.6,-695.49 -146.11,-695.49 ccw(c-146.11,-745.71) -181.62,-710.2 ccw(c-138.14,-753.68) -199.63,-753.68 -199.63,-780.07 cw(c-223.74,-780.07) -206.69,-797.11 cw(c-232.94,-770.87) -232.94,-807.99 -290.85,-807.99 cw(c-290.85,-805.53) -293.31,-805.53 -293.31,-794.79 cw(c-289.13,-794.79) -289.13,-790.61 -268.34,-790.53 -232.18,-790.53 ccw(c-232.18,-775.75) -221.73,-786.2 ccw(c-237.13,-770.8) -215.35,-770.8 -215.35,-726.05 cw(c-203.44,-726.05) -211.86,-717.63 -176.7,-682.46 cw(c-171.23,-689.04) -170.45,-680.52 ccw(c-168.91,-676.81) -167.38,-680.52 -122.51,-680.52
  region net 52>32: -289.56,-614.46 ccw(c-289.56,-637.22) -305.66,-621.13 -308.79,-624.26 ccw(c-299.31,-633.75) -312.72,-633.75 -312.72,-761.04 cw(c-325.27,-761.04) -316.4,-769.91 -346.2,-799.71 cw(c-356.25,-789.66) -356.25,-803.87 ccw(c-356.35,-810.34) -362.82,-810.25 cw(c-396.95,-810.25) -396.95,-844.38 -445.74,-844.38 cw(c-445.74,-831.66) -458.46,-831.66 -458.46,-779.12 cw(c-436.97,-779.2) -436.97,-757.7 -348.99,-757.7 ccw(c-348.84,-739.5) -330.65,-739.13 -330.65,-614.84 cw(c-314.27,-614.84) -314.27,-598.47 -286.4,-598.47
  region net 32>52: -289.49,-559.25 -292.87,-559.25 ccw(c-292.87,-640.91) -350.62,-583.17 -372.94,-605.49 ccw(c-331.29,-632.82) -381.04,-635.3 ccw(c-318.29,-609.32) -355.51,-666.13 cw(c-358.6,-673.11) -351.5,-675.92 -351.5,-712.05 cw(c-384.01,-712.37) -384.02,-744.88 -451.63,-744.88 cw(c-451.63,-720.67) -475.84,-720.67 -475.84,-677.43 cw(c-430.46,-677.43) -438.16,-632.71 ccw(c-497.68,-509.98) -401.23,-606.42 -339.54,-544.73 cw(c-336.79,-547.48) -335.71,-543.74 -289.49,-543.74
  region net 52>32: -313.06,-720.71 -313.06,-764.27 cw(c-381.53,-764.27) -333.11,-812.69 -342.08,-821.65 cw(c-396.95,-766.78) -390.33,-844.1
  region net +3.3V: -355,750 ccw(c-304.74,800.26) -304.74,729.18 -278.96,729.18 -278.96,700.67 cw(c-293.3,700.67) -283.16,690.53 ccw(c-283.16,602.88) -345.14,664.86 -355,655 -368.62,668.62
  region net GND: -35.37,248.35 -31.56,244.54 ccw(c12,288.11) 12,226.5 ccw(c12,222.34) 9.06,225.28 -2.82,213.4 ccw(c-9.91,206.31) -9.91,216.34 -45.63,216.34 -45.63,221.71 ccw(c-53.79,221.71) -48.02,227.47
  region net GND: -79.74,190.63 -38.71,190.63 cw(c-38.71,90.63) 32,161.34 36.2,157.14 cw(c51.54,172.48) 29.85,172.48 29.85,195.33 cw(c29.85,205.42) 22.71,198.29 12,209
  region net SWDCLK: 104.05,-426.11 cw(c122.37,-422.93) 107.17,-412.23 107.82,-411.36 cw(c123.38,-428.63) 124.59,-405.41 169.16,-405.41 ccw(c169.16,-378.88) 187.92,-397.64 188.89,-396.68 cw(c202.16,-409.94) 202.16,-391.18 238.16,-391.18 ccw(c238.16,-378.06) 251.29,-378.05 251.29,-323.45 ccw(c240.47,-323.45) 240.47,-312.63 188.61,-312.63 ccw(c188.61,-323.62) 177.62,-323.62 177.4,-356.81 177.4,-358.21 cw(c152.57,-358.21) 170.12,-375.77 cw(c146.94,-352.59) 146.94,-385.37 113.65,-385.37 ccw(c113.65,-416.73) 95.69,-391.02 ccw(c113.36,-408.75) 88.33,-408.72 88.33,-426.27

## Silkscreen, mask and mechanical layers (free items; w line width, h text height)
Top Overlay:
  text "W" at 115,640 h31.5 r90
  text "GND" at -510,620 h31.5 r270
  text "3.3" at -410,620 h31.5 r270
  text "Y" at 115,440 h31.5 r90
  text "X" at 115,265 h31.5 r90
  text "RX" at 110,-40 h31.5 r90
  text "GND" at -496,-51 h31.5
  text "3.3" at -496,-151 h31.5
  text "TX" at 115,-195 h31.5 r90
  text "DIO" at -496,-251 h31.5
  text "CLK" at -496,-351 h31.5
  text "32>52" at -320,-720 h31.5
  text "52>32" at -320,-810 h31.5

## Text inside footprints (layer, text, board x,y; h text height)
BLE: Mechanical 2 "No ground pad" at -137.95,-671.93 h31.5 r179.79; Mechanical 3 "No ground pad" at -134.57,-552.32 h31.5 r179.61